# Altium PCB Mako DSP Pro R1.0.PcbDoc (part 1 of 2)
Units mil, origin at the board's own origin, x right, y up, seen from the top; angles counter-clockwise.
Board outline 4040 x 2100 mil, 4 copper layers (Top Layer, GND, Power, Bottom Layer); 159 components, 101 nets, 707 pads, 150 vias.
Unrouted connection lines stored in the file: 172.
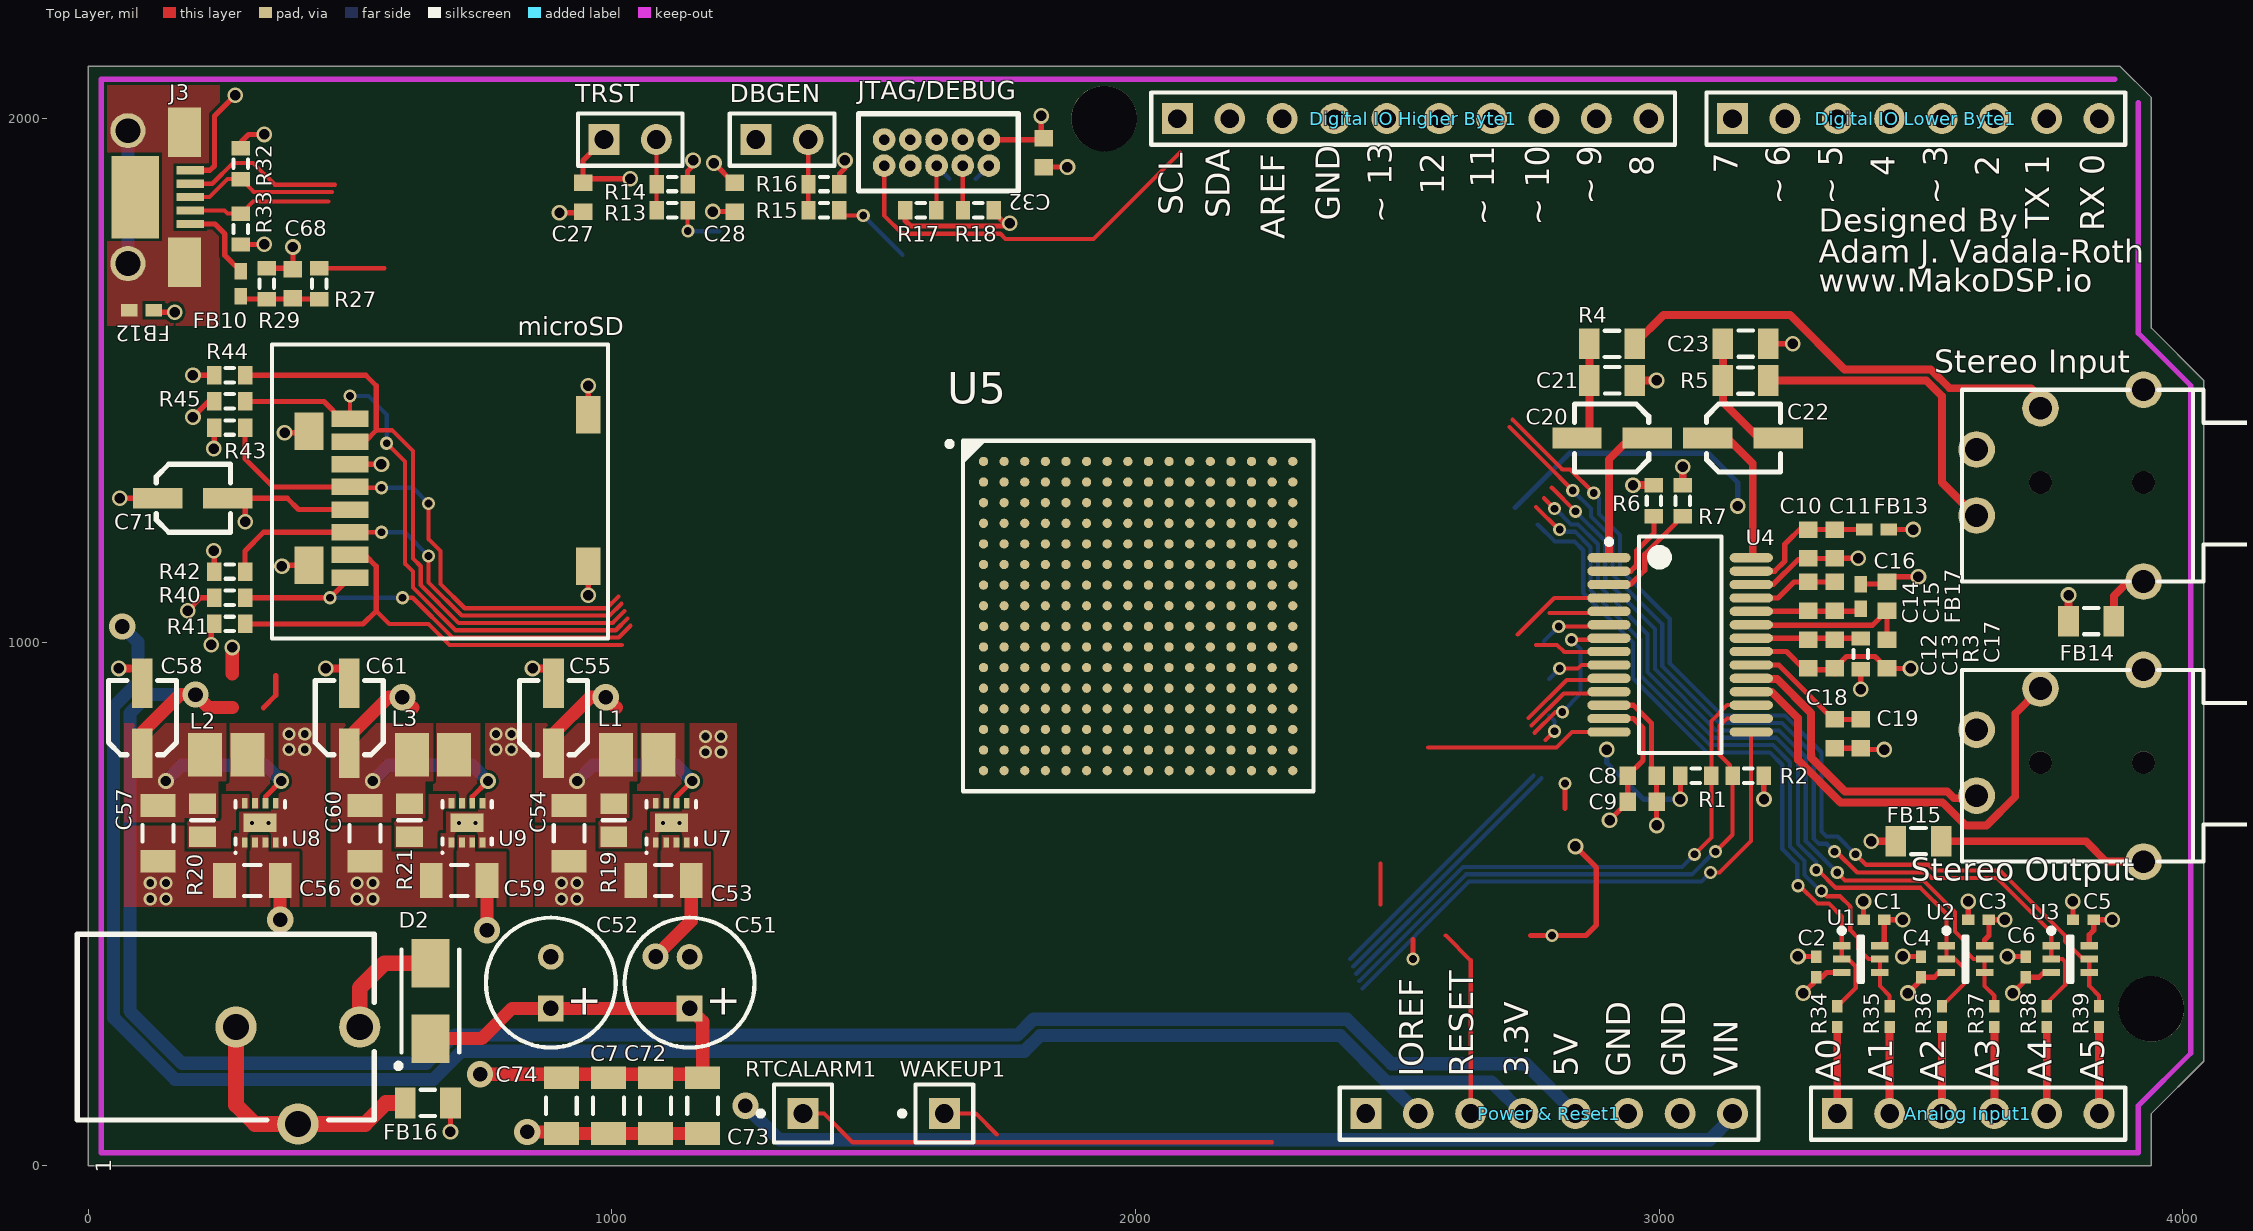
[diagram p0: Top Layer view]
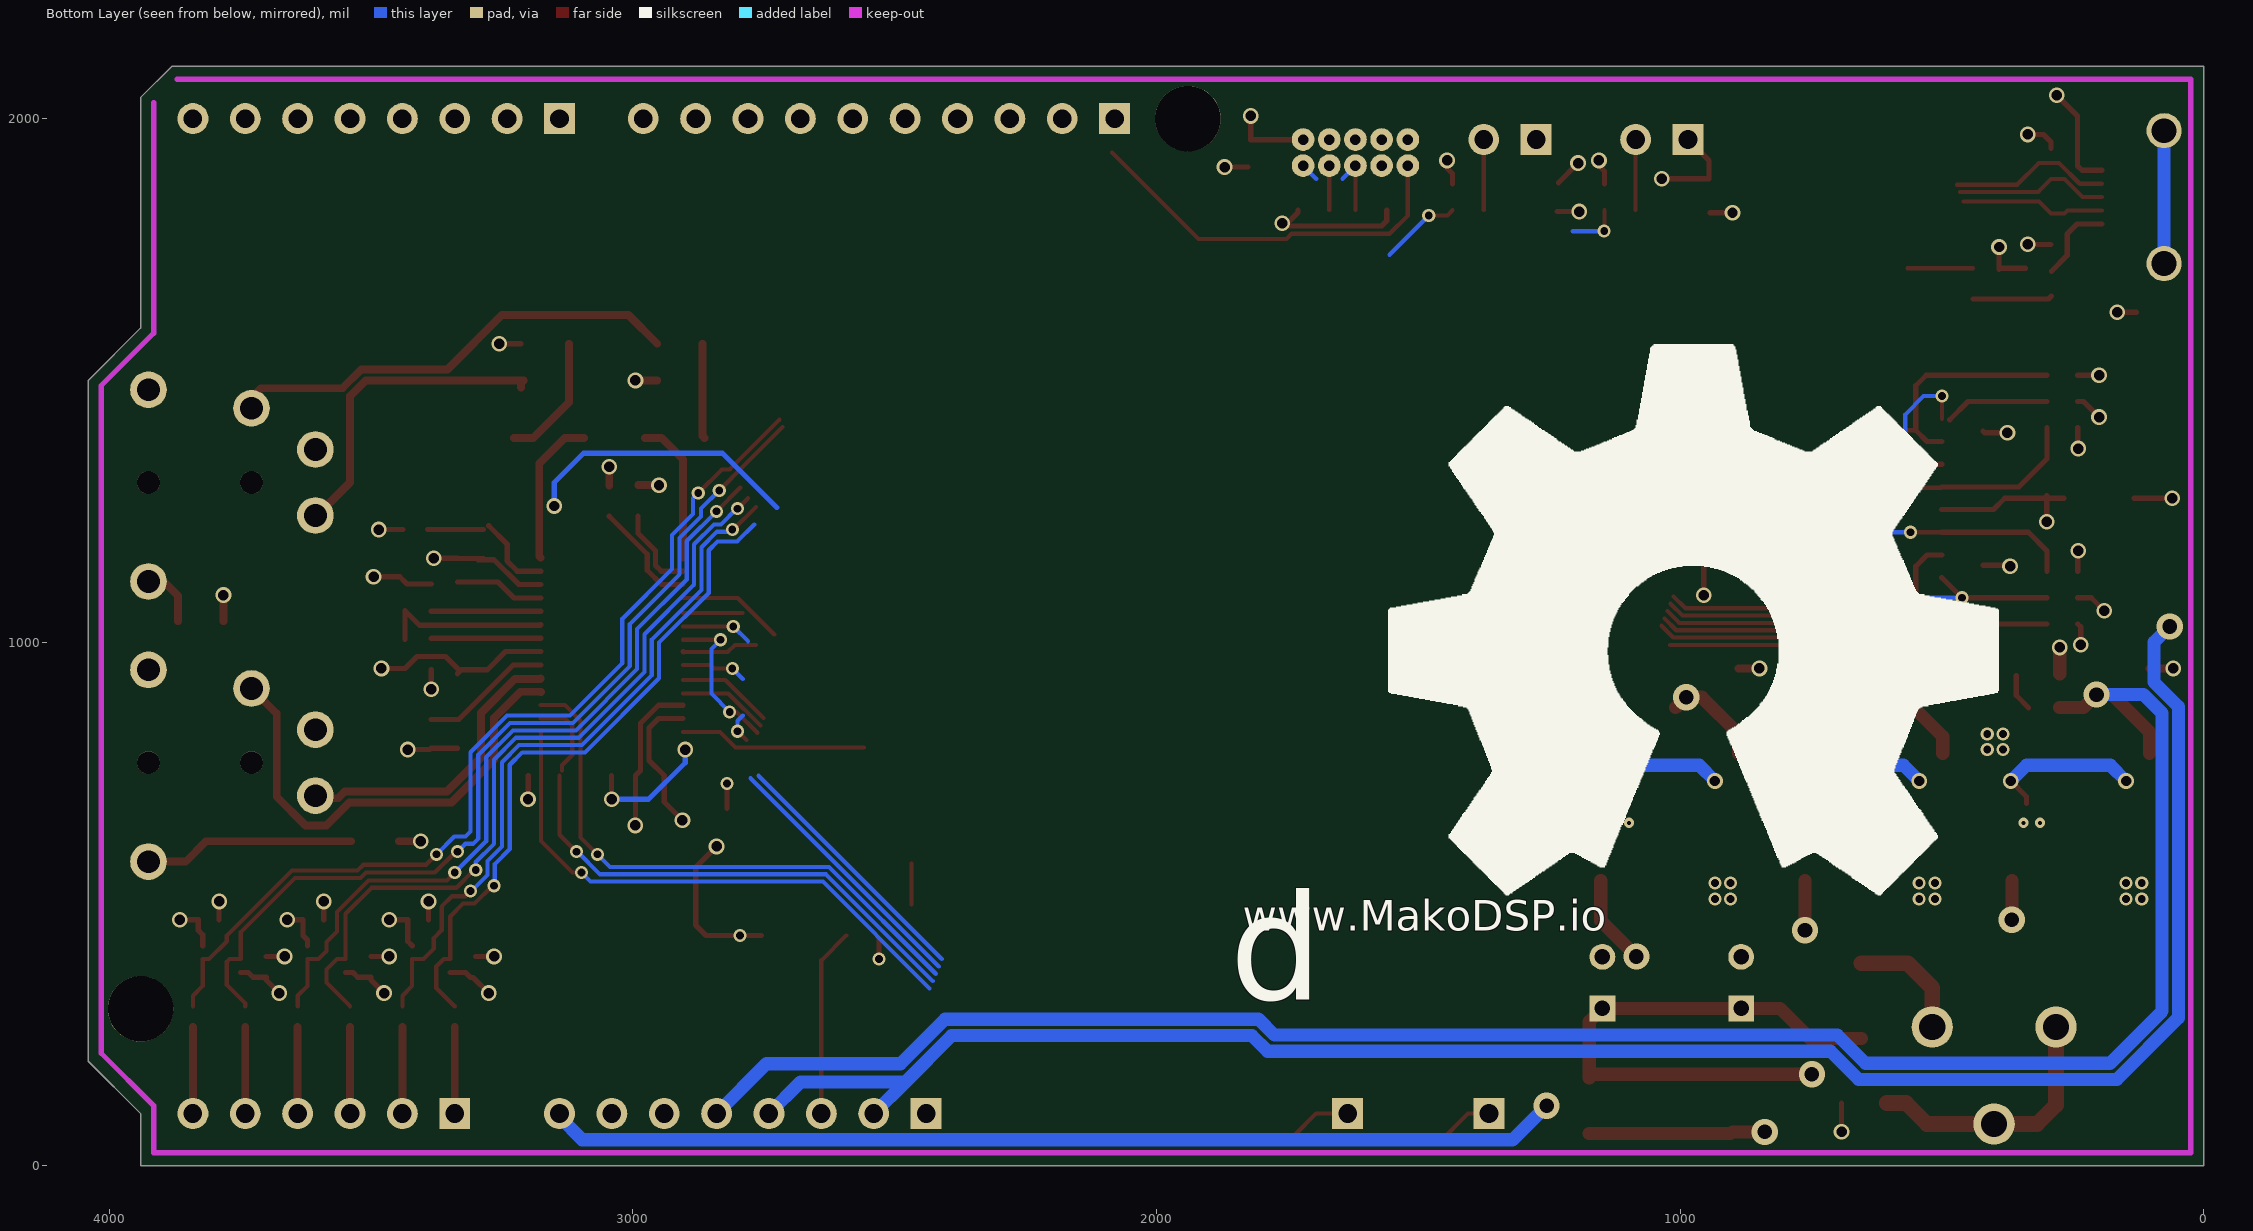
[diagram p1: Bottom Layer view, seen from below]
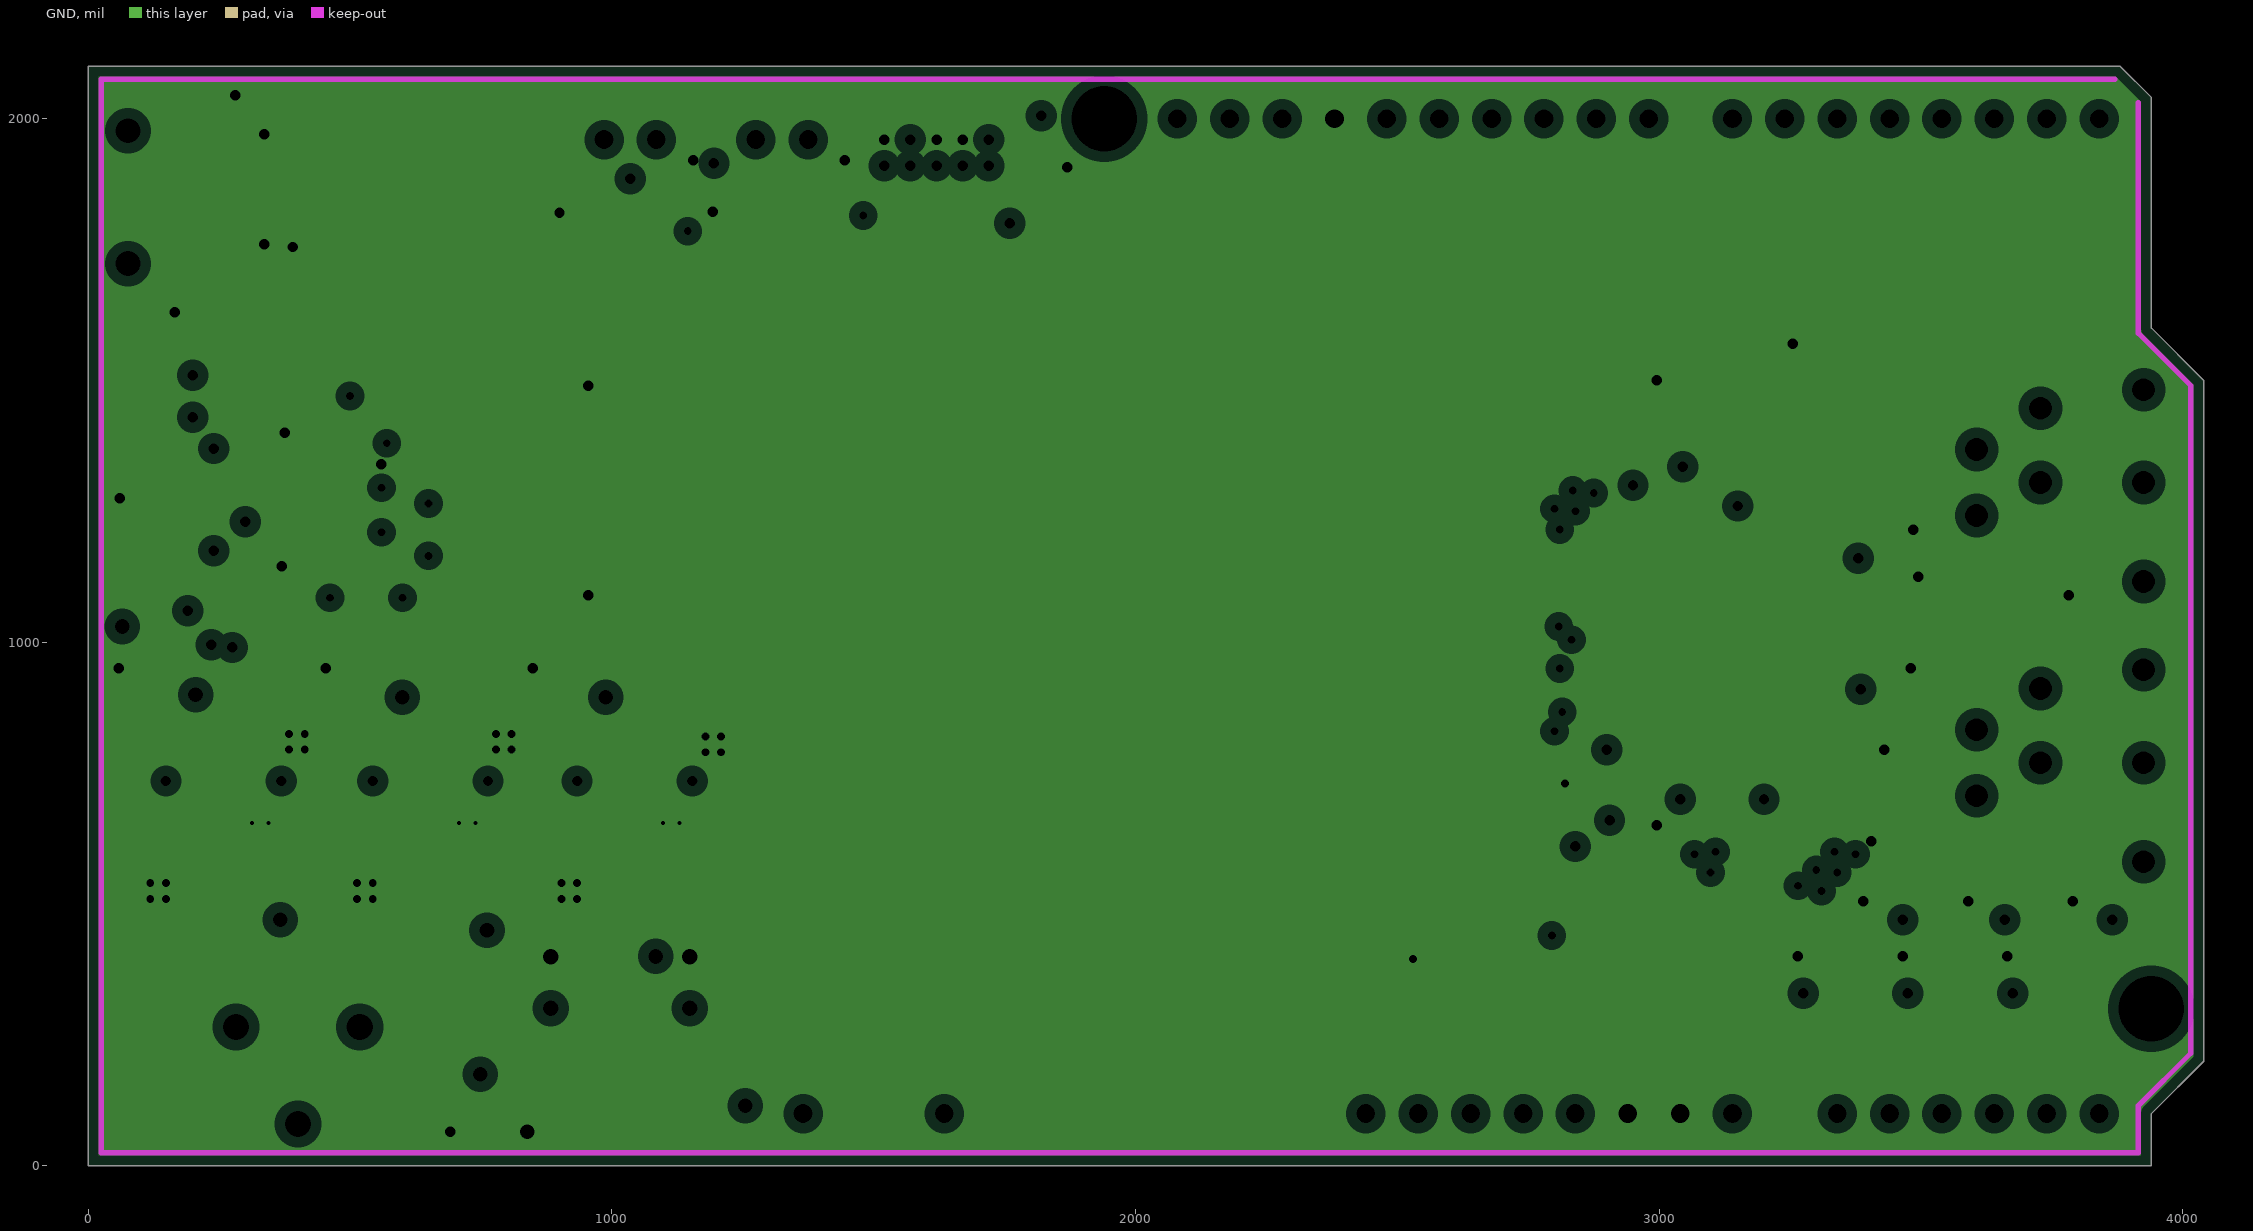
[diagram p2: GND, clearances drawn from the general rule]
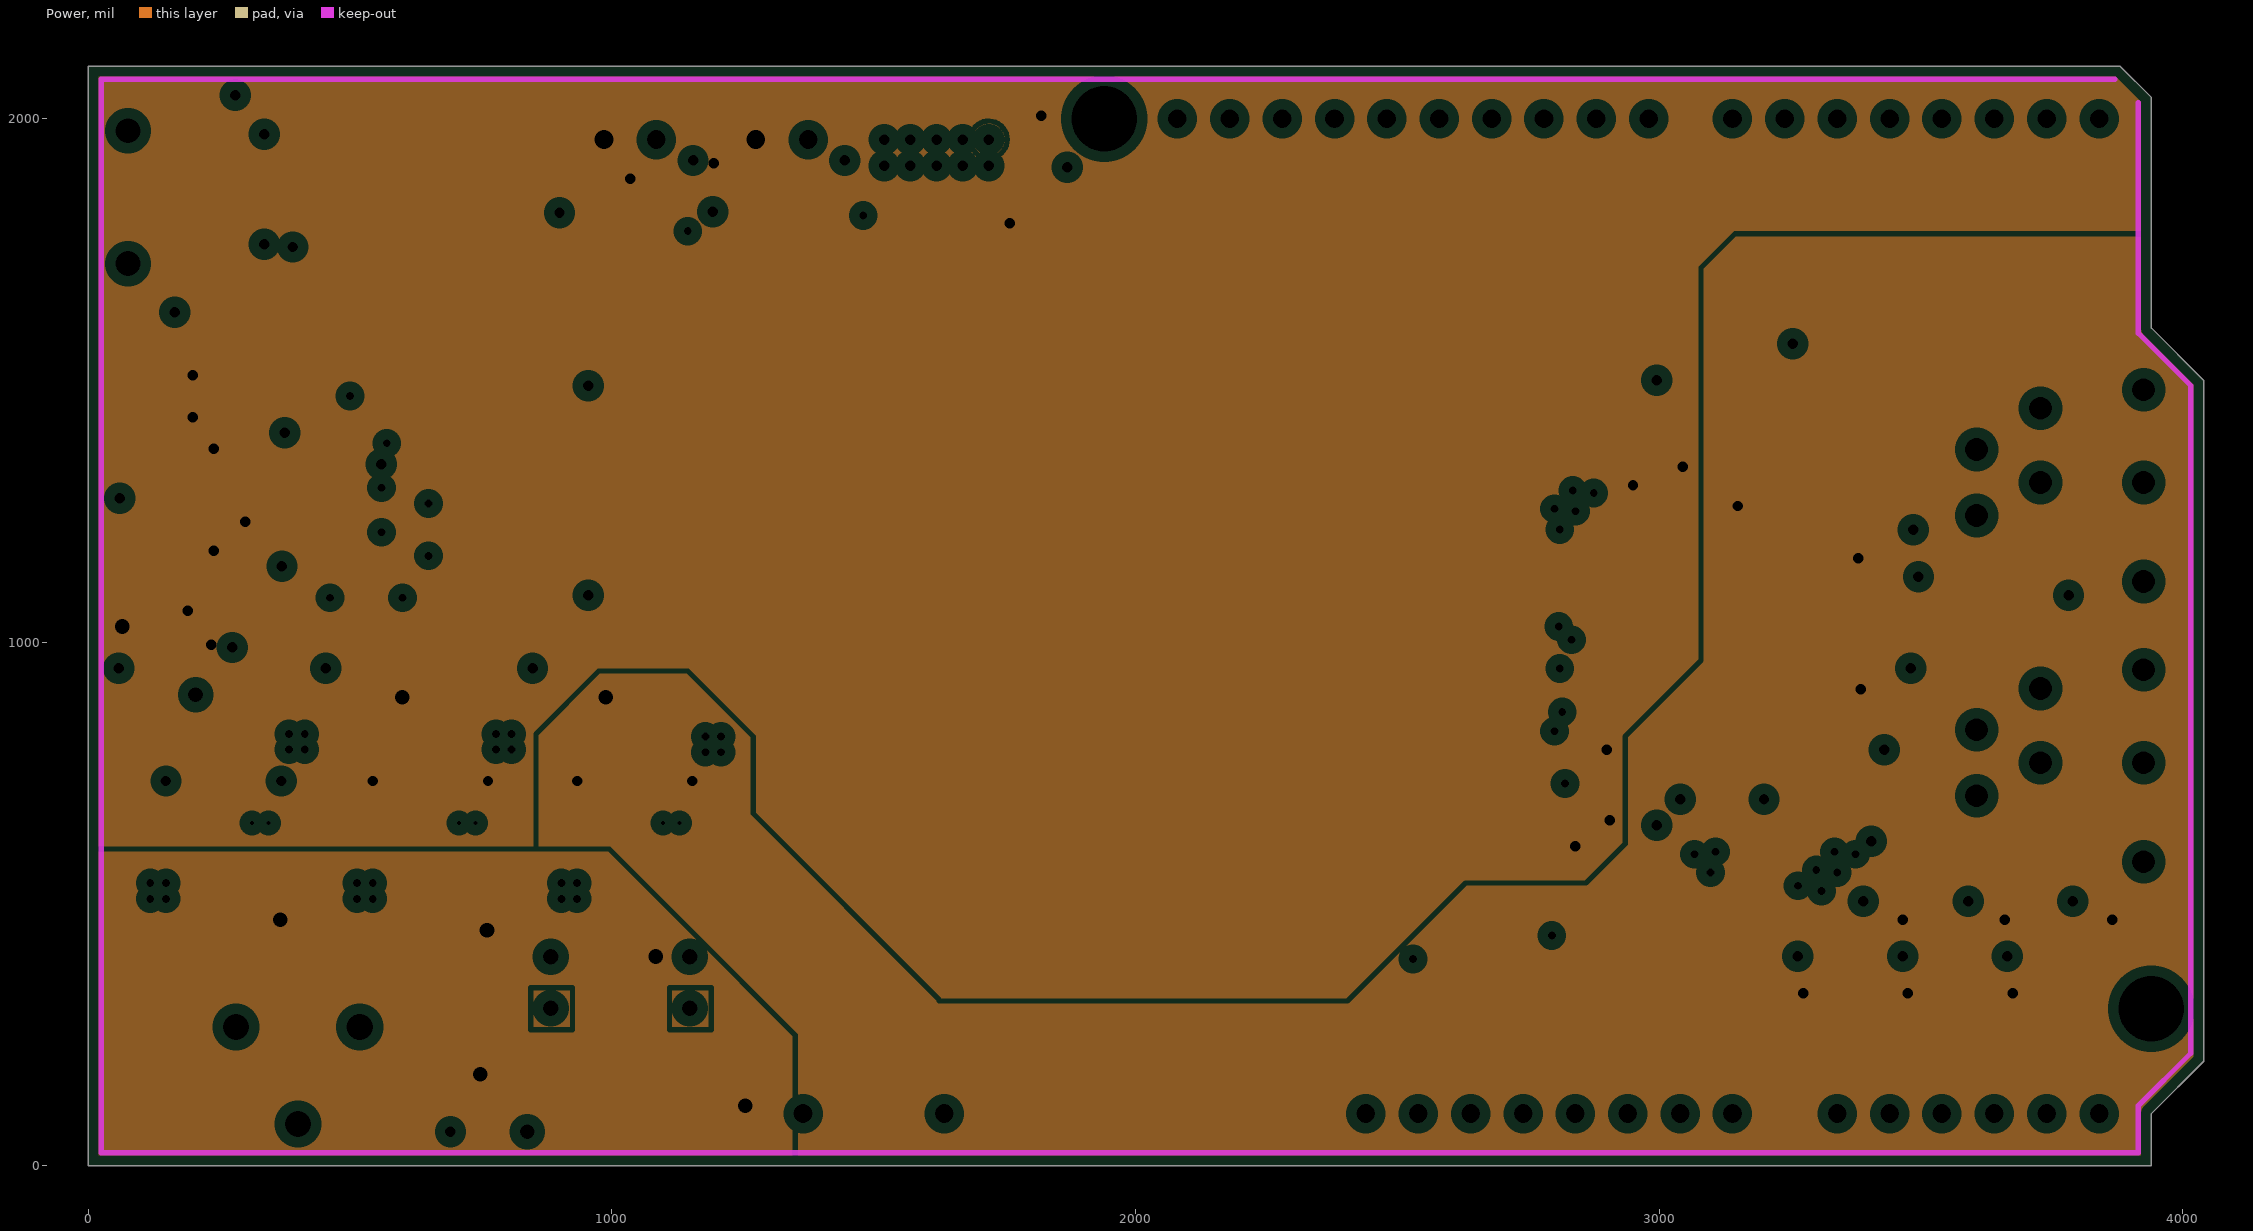
[diagram p3: Power, clearances drawn from the general rule]

## Layer stack, top to bottom
Top Layer: signal copper 1.4
Dielectric: core 12.6, FR-4, Dk 4.8
GND: plane copper 1.4, net GND
Dielectric: prepreg 12.6, FR-4, Dk 4.8
Power: plane copper 1.4, net (Multiple Nets)
Dielectric: core 12.6, FR-4, Dk 4.8
Bottom Layer: signal copper 1.4

## Board outline
0,0 0,2100 3880,2100 3940,2040 3940,1600 4040,1500 4040,200 3940,100 3940,0

## Design rules (kind name [scope] priority, off if disabled: settings)
Clearance [All] p1: gap=6
ComponentClearance [All] p1: gap=0 collisioncheckmode=3 verticalgap=10 showdistances=FALSE
DiffPairsRouting [All] p1: maxlimit=10 minlimit=10 mostfreqgap=10 maxuncoupledlength=500
FanoutControl Fanout_BGA [IsBGA] p1: bgadir=Out bgaviamode=Centered fanoutstyle=BGA fanoutdirection=Alternating viagrid=1 // Fanout_BGA (Default Rule)
FanoutControl Fanout_SOIC [(InComponent('U8') AND InComponent('U7'))] p3: bgadir=Out bgaviamode=Centered fanoutstyle=Staggered fanoutdirection=Alternating viagrid=1 // Fanout_SOIC (Default Rule)
FanoutControl Fanout_Small [All] p4: bgadir=Out bgaviamode=Centered fanoutstyle=Auto fanoutdirection=Alternating viagrid=1 // Fanout_Small (Default Rule)
HoleSize [All] p1: absolutevalues=TRUE maxlimit=120 minlimit=1 maxpercent=80.000 minpercent=20.000
MinimumAnnularRing [All] p1: minimumring=5
MinimumSolderMaskSliver [All] p1 off: minsoldermaskwidth=10
PlaneClearance [All] p1: clearance=20
PlaneConnect [All] p1: planeconnectstyle=Direct reliefexpansion=20 reliefentries=4 reliefconductorwidth=10 reliefairgap=10
PolygonConnect [All] p1: connectstyle=Direct reliefconductorwidth=45 reliefentries=4 polygonreliefangle="90 Angle" airgapwidth=10
RoutingVias [All] p1: holewidth=15 width=25 viastyle="Through Hole" minholewidth=15 minwidth=25 maxholewidth=28 maxwidth=50
SilkToSilkClearance [All] p1 off: silktosilkclearance=10
SilkToSolderMaskClearance SilkscreenOverComponentPads [IsPad] p1 off: minsilkscreentomaskgap=10 clearancetoexposedcopper=TRUE
SolderMaskExpansion [All] p1: expansion=4
Width [All] p1: maxlimit=30 minlimit=6 preferedwidth=6 minimp=50.000000 maximp=50.000000 favimp=50.000000
17 further rules are at their usual default settings.

## Classes and differential pairs
component class "Mako DSP Pro USB R1.0": C26 C50 C62 C63 C64 C68 FB7 FB10 FB12 J3 R22 R27 R29 R32 R33 R47 U6 U10
component class "Mako DSP Pro Main R1.0": C24 C25 C27 C28 C29 C30 C31 C32 C33 C34 C35 C36 C37 C38 C39 C40 C41 C42 C43 C44 C45 C46 C47 C48 C49 C50 C65 C66 C67 C69 C70 C71 C75 C76 C77 DBGEN FB1 FB2 FB3 FB4 FB5 FB6 "ISP PGM" JTAG/DEBUG microSD R8 R12 R13 R14 R15 R16 R17 R18 R40 R41 R42 R43 R44 R45 RESET Reset RTCALARM1 TRST U5 WAKEUP1 X1 X2
component class "Mako DSP Pro Audio Codec R1.0": C8 C9 C10 C11 C12 C13 C14 C15 C16 C17 C18 C19 C20 C21 C22 C23 FB13 FB14 FB15 FB17 R1 R2 R3 R4 R5 R6 R7 "Stereo Input" "Stereo Input?" "Stereo Output" "Stereo Output?" U4
component class "Mako DSP Pro Arduio IO R1.0": "Analog Input1" "Analog Input?" C1 C2 C3 C4 C5 C6 "Digital IO Higher Byte1" "Digital IO Higher Byte?" "Digital IO Lower Byte1" "Digital IO Lower Byte?" "Power & Reset1" "Power & Reset?" R34 R35 R36 R37 R38 R39 SSP? U1 U2 U3
component class "Mako DSP Pro Power R1.0": 1 12VDC/VCCIN C7 C51 C52 C53 C54 C55 C56 C57 C58 C59 C60 C61 C72 C73 C74 D2 D? FB16 L1 L2 L3 L? R19 R20 R21 U7 U8 U9
differential pair USB0: +USB0_P -USB0_N

## Components (designator, comment, footprint, x,y, rotation, side; value= is the part's Value field where it differs from the comment)
1 "Center-positive 2.1 mm power jack" PJ-102AH 518.48,265 r90 top
"Analog Input1" "Arduino Leonardo Analog" "Arduino Leonardo Analog" 3340,100 r0 top locked
C1 "Cap Semi" 0402 3410,470 r0 top
C2 "Cap Semi" 0402 3300,380 r270 top
C3 "Cap Semi" 0402 3610,470 r0 top
C4 "Cap Semi" 0402 3500,380 r270 top
C5 "Cap Semi" 0402 3810,470 r0 top
C6 "Cap Semi" 0402 3700,380 r270 top
C7 "Cap Semi" C1206 993.48,115 r90 top
C8 "Cap Semi" 1608[0603] 2967.56,745.31 r180 top
C9 "Cap Semi" 1608[0603] 2967.56,695.31 r180 top
C10 "Cap Semi" 1608[0603] 3285,1187.56 r270 top
C11 "Cap Semi" 1608[0603] 3335,1187.56 r270 top
C12 "Cap Semi" 1608[0603] 3285,977.56 r90 top
C13 "Cap Semi" 1608[0603] 3335,977.56 r90 top
C14 "Cap Semi" 1608[0603] 3285,1087.56 r90 top
C15 "Cap Semi" 1608[0603] 3335,1087.56 r90 top
C16 "Cap Semi" 1608[0603] 3435,1087.56 r270 top
C17 "Cap Semi" 1608[0603] 3435,977.56 r90 top
C18 "Cap Semi" 1608[0603] 3335,825 r90 top
C19 "Cap Semi" 1608[0603] 3385,825 r90 top
C20 "Cap Semi" "Panasonic VS B" 2910,1390 r0 top
C21 "Cap Semi" "SM 0805 - gap trimmed" 2910,1500 r180 top
C22 "Cap Semi" "Panasonic VS B" 3160,1390 r180 top
C23 "Cap Semi" "SM 0805 - gap trimmed" 3165,1570 r180 top
C24 "Cap Semi" 0402 2905,2407.05 r90 bottom
C25 "Cap Semi" 0402 2780,2407.05 r90 bottom
C26 "Cap Semi" 1608[0603] 1720,2620 r180 top
C27 "Cap Semi" CAPC1608L 945,1850 r90 top
C28 "Cap Semi" CAPC1608L 1235,1850 r90 top
C29 "Cap Semi" CAPC1608L 2860,3155 r0 top
C30 "Cap Semi" 1608[0603] 1515,3850 r90 top
C31 "Cap Semi" 1608[0603] 1865,3837.05 r90 top
C32 "Cap Semi" CAPC1608L 1825,1935 r270 top
C33 "Cap Semi" 1608[0603] 2875,3947.05 r90 top
C34 "Cap Semi" 1608[0603] 2820,3947.05 r90 top
C35 "Cap Semi" 1608[0603] 2900,3687.05 r90 top
C36 "Cap Semi" 1608[0603] 2900,3792.05 r270 top
C37 "Cap Semi" 0402 2745,3497.05 r180 top
C38 "Cap Semi" 0402 2515,3242.05 r90 top
C39 "Cap Semi" 0402 2230,3225 r90 top
C40 "Cap Semi" 0402 1805,-250 r90 top
C41 "Cap Semi" 0402 1575,-210 r90 top
C42 "Cap Semi" 0402 1395,-270 r90 top
C43 "Cap Semi" 0402 1560,-400 r0 top
C44 "Cap Semi" 0402 1200,3702.05 r0 top
C45 "Cap Semi" 0402 1855,3705 r90 top
C46 "Cap Semi" 0402 1445,3697.05 r270 top
C47 "Cap Semi" 0402 2130,3492.05 r270 top
C48 "Cap Semi" 0402 2685,3880 r270 top
C49 "Cap Semi" 0402 2700,3802.05 r270 top
C50 "Cap Semi" 0402 4550,725 r90 top
C50 "Cap Semi" 1608[0603] 1715,2440 r0 top
C51 "Cap Pol1" CAPPR2.5-6.3x5 1148.48,350 r90 top
C52 "Cap Pol1" CAPPR2.5-6.3x5 883.48,350 r90 top
C53 "Cap Semi" C1206 1098.48,545 r0 top
C54 "Cap Semi" C1206 918.48,635 r90 top
C55 "Cap Semi" "Panasonic VS B" 888.48,855 r270 top
C56 "Cap Semi" C1206 313.48,545 r0 top
C57 "Cap Semi" C1206 133.48,635 r90 top
C58 "Cap Semi" "Panasonic VS B" 103.48,855 r270 top
C59 "Cap Semi" C1206 708.48,545 r0 top
C60 "Cap Semi" C1206 528.48,635 r90 top
C61 "Cap Semi" "Panasonic VS B" 498.48,855 r270 top
C62 "Cap Semi" 1608[0603] 1595,2610 r180 top
C63 "Cap Semi" 1608[0603] 1595,2555 r180 top
C64 "Cap Semi" 1608[0603] 1570,2475 r90 top
C65 "Cap Semi" 0402 4780,725 r90 top
C66 "Cap Semi" 0402 5010,725 r90 top
C67 "Cap Semi" 0402 5240,725 r90 top
C68 "Cap Semi" 1608[0603] 390.96,1684.74 r270 top
C69 "Cap Semi" 0402 5470,725 r90 top
C70 "Cap Semi" 0402 5700,725 r90 top
C71 "Cap Semi" "Panasonic VS B" 200,1274.92 r180 top
C72 "Cap Semi" C1206 1083.48,115 r90 top
C73 "Cap Semi" C1206 1173.48,115 r90 top
C74 "Cap Semi" C1206 903.48,115 r90 top
C75 "Cap Semi" 0402 5930,725 r90 top
C76 "Cap Semi" 0402 6160,725 r90 top
C77 "Cap Semi" 0402 6390,725 r90 top
D2 "PMEG4050EP" PMEG4050EP 653.48,315 r90 top
DBGEN "Header 2" HDR1X2 1275,1960 r0 top (schematic designator DBGEN1)
"Digital IO Higher Byte1" "Arduino Leonardo High Byte" "Arduino Leonardo High Byte" 2080,2000 r0 top locked
"Digital IO Lower Byte1" "Arduino Leonardo Low Byte" "Arduino Leonardo Low Byte" 3140,2000 r0 top locked
FB1 "BLM15HG601SN1D" BLM18PG121SN1D 2735,2397.05 r90 bottom
FB2 "BLM15HG601SN1D" BLM18PG121SN1D 2860,2397.05 r90 bottom
FB3 "BLM15HG601SN1D" BLM18PG121SN1D 2601.42,2397.05 r270 bottom
FB4 "BLM15HG601SN1D" BLM18PG121SN1D 2680,2397.05 r270 bottom
FB5 "BLM15HG601SN1D" BLM18PG121SN1D 2955,3972.05 r180 top
FB6 "BLM15HG601SN1D" BLM18PG121SN1D 2955,3922.05 r180 top
FB7 "BLM15HG601SN1D" BLM18PG121SN1D 1625,2475 r270 top
FB10 "BLM15HG601SN1D" BLM18PG121SN1D 290.96,1684.74 r90 top
FB12 "BLM15HG601SN1D" BLM18PG121SN1D 101.54,1634.02 r0 top
FB13 "BLM15HG601SN1D" BLM18PG121SN1D 3415.16,1215.16 r0 top
FB14 "Ferrite" "SM 0805 - gap trimmed" 3825,1040 r180 top
FB15 "Ferrite" "SM 0805 - gap trimmed" 3495,620 r180 top
FB16 "Ferrite" "SM 0805 - gap trimmed" 648.48,120 r180 top
FB17 "BLM15HG601SN1D" BLM18PG121SN1D 3385,1087.56 r90 top
J3 "DX4R005J91R5100" "Micro USB Circular Holes Only" 36.54,1849.02 r270 top
JTAG/DEBUG "S9015E-05-ND" S9015E-05-ND 1520,1960 r0 top (schematic designator JTAG/DEBUG1)
L1 "Inductor" VLS252012T-2R2M1R3 1048.48,785 r180 top
L2 "Inductor" VLS252012T-2R2M1R3 263.48,785 r180 top
L3 "Inductor" VLS252012T-2R2M1R3 658.48,785 r180 top
microSD "JAE SJ107021" "JAE SJ107021" 955,1274.92 r0 top (schematic designator SD1)
"Power & Reset1" "Arduino Leonardo Power" "Arduino Leonardo Power" 2440,100 r0 top locked
R1 "Res3" J1-0603 3070.16,745.16 r180 top
R2 "Res3" J1-0603 3170.16,745.16 r0 top
R3 "Res3" J1-0603 3385,977.56 r270 top
R4 "Res3" "SM 0805 - gap trimmed" 2910,1570 r0 top
R5 "Res3" "SM 0805 - gap trimmed" 3165,1500 r0 top
R6 "Res3" J1-0603 2990,1270 r270 top
R7 "Res3" J1-0603 3045,1270 r270 top
R8 "Res3" J1-0603 2515,2397.05 r90 bottom
R12 "Res3" J1-0603 3020,3155 r0 top
R13 "Res3" J1-0603 1115,1825 r180 top
R14 "Res3" J1-0603 1115,1875 r180 top
R15 "Res3" J1-0603 1405,1825 r180 top
R16 "Res3" J1-0603 1405,1875 r180 top
R17 "Res3" J1-0603 1590,1825 r180 top
R18 "Res3" J1-0603 1700,1825 r0 top
R19 "Res3" RESC2012L 1003.48,660 r90 top
R20 "Res3" RESC2012L 218.48,660 r90 top
R21 "Res3" RESC2012L 613.48,660 r90 top
R22 "Res3" J1-0603 1215,2480 r90 top
R27 "Res3" J1-0603 440.96,1684.74 r90 top
R29 "Res3" J1-0603 340.96,1684.74 r90 top
R32 "Res3" J1-0603 291.54,1914.02 r90 top
R33 "Res3" J1-0603 291.54,1789.02 r270 top
R34 "Res3" "0402 - duplicate" 3340,285 r90 top
R35 "Res3" "0402 - duplicate" 3440,285 r90 top
R36 "Res3" "0402 - duplicate" 3540,285 r90 top
R37 "Res3" "0402 - duplicate" 3640,285 r90 top
R38 "Res3" "0402 - duplicate" 3740,285 r90 top
R39 "Res3" "0402 - duplicate" 3840,285 r90 top
R40 "Res3" J1-0603 270,1084.92 r0 top
R41 "Res3" J1-0603 270,1034.92 r0 top
R42 "Res3" J1-0603 270,1134.92 r0 top
R43 "Res3" J1-0603 270,1409.92 r0 top
R44 "Res3" J1-0603 270,1509.92 r0 top
R45 "Res3" J1-0603 270,1459.92 r0 top
R47 "Res3" J1-0603 1215,2585 r90 top
Reset "Tactile Switch" TL3301 2940,3305 r90 top (schematic designator RESET1)
RTCALARM1 "Socket" PIN1 1365,100 r90 top
"Stereo Input" "CUI 43515TS" "CUI SJ-43515TS" 3925,1305 r180 top (schematic designator "Stereo Input1")
"Stereo Output" "CUI 43515TS" "CUI SJ-43515TS" 3925,770 r180 top (schematic designator "Stereo Output1")
TRST "Header 2" HDR1X2 985,1960 r0 top (schematic designator TRST1)
U1 "BAV70S SOT-363" BAV70S_SOT363 3385,395 r0 top
U2 "BAV70S SOT-363" BAV70S_SOT363 3585,395 r0 top
U3 "BAV70S SOT-363" BAV70S_SOT363 3785,395 r0 top
U4 "WM8778" WM8778 3040,995 r0 top
U5 "LPC4330FET256" SOT740-2 2005,1050 r0 top
U6 "BAV70S SOT-363" BAV70S_SOT363 1720,2530 r90 top
U7 "TPS62162SOP" DSG8-1600X900TP 1113.48,655 r90 top
U8 "TPS62162SOP" DSG8-1600X900TP 328.48,655 r90 top
U9 "TPS62162SOP" DSG8-1600X900TP 723.48,655 r90 top
U10 "LM3525" LM3525 1390,2530 r0 top
WAKEUP1 "Socket" PIN1 1635,100 r90 top
X1 "ABM3B-12.000MHZ-B2-T" ABM3B-12.000MHZ-B2-T 1780,3870 r180 top
X2 "ABS07-32.768KHZ-T" ABS07-32.768KHZ-T 2810,3702.05 r90 top

## Footprints (in the part's own frame and the unit in brackets; to place one, negate y for a bottom-side part, rotate by r counter-clockwise, add the part's x,y. Pads: shape width x height; smd on the part's side, far side on the other; paste and mask are expansions set on the pad)
0402 [mm] "Chip Capacitor, Body 1.0x0.5mm, IPC High Density"
  rect 0.6x0.5 smd: 1(-0.5,0) 2(0.5,0)
  body extent -0.55,-0.3 0.55,0.3, height 1.3
"0402 - duplicate" [mm] "Chip Capacitor, Body 1.0x0.5mm, IPC High Density"
  rect 0.6x0.5 smd: 1(-0.5,0) 2(0.5,0)
  body extent -0.55,-0.3 0.55,0.3, height 1.3
1608[0603] [mm] "Chip Capacitor, Body 1.6x0.8mm, IPC High Density"
  rect 0.8x0.9 smd: 1(-0.7,0) 2(0.7,0)
  body extent -0.87,-0.48 0.87,0.48, height 1.3
ABM3B-12.000MHZ-B2-T [mm] "ABM3B-12.000MHZ-B2-T 12MHZ Crystam Oscillator"
  rect 1.8x1.2 smd: 1(0,0) 2(4,0) 3(4,2.4) 4(0,2.4)
  silkscreen extent -1.5,-1.2 5.5,3.5
ABS07-32.768KHZ-T [mm] "ABS07-32.768KHZ-T Crystal Oscillator"
  rect 1.1x1.9 smd: 1(0,0) 2(1.95,0)
  silkscreen extent -1.1,-1.5 3,1.5
"Arduino Leonardo Analog" [mm] "Connector; Header; 6 Position"
  rect 1.5x1.5 hole 0.9: 1(0,0)
  round 1.5 hole 0.9: 2(2.54,0) 3(5.08,0) 4(7.62,0) 5(10.16,0) 6(12.7,0)
  silkscreen extent -1.27,-1.27 13.97,1.27
"Arduino Leonardo High Byte" [mm]
  rect 1.5x1.5 hole 0.9: 1(0,0)
  round 1.5 hole 0.9: 2(2.54,0) 3(5.08,0) 4(7.62,0) 5(10.16,0) 6(12.7,0) 7(15.24,0) 8(17.78,0) 9(20.32,0) 10(22.86,0)
  silkscreen extent -1.27,-1.27 24.13,1.27
"Arduino Leonardo Low Byte" [mm] "Connector; Header; 8 Position"
  rect 1.5x1.5 hole 0.9: 1(0,0)
  round 1.5 hole 0.9: 2(2.54,0) 3(5.08,0) 4(7.62,0) 5(10.16,0) 6(12.7,0) 7(15.24,0) 8(17.78,0)
  silkscreen extent -1.27,-1.27 19.05,1.27
"Arduino Leonardo Power" [mm] "Connector; Header; 8 Position"
  rect 1.5x1.5 hole 0.9: 1(0,0)
  round 1.5 hole 0.9: 2(2.54,0) 3(5.08,0) 4(7.62,0) 5(10.16,0) 6(12.7,0) 7(15.24,0) 8(17.78,0)
  silkscreen extent -1.27,-1.27 19.05,1.27
BAV70S_SOT363 [mm] "SOT23, 6-Leads, Body 2.2x2.2mm (max), Pitch 0.65mm, IPC Medium Density"
  rect 0.85x0.35 smd: 1(-0.925,0.65) 2(-0.925,0) 3(-0.925,-0.65) 4(0.925,-0.65) 5(0.925,0) 6(0.925,0.65)
  silkscreen extent -1.05,-1.1 0.1,1.5, body extent -0.67,-1.1 0.67,1.1, height 1.1
BLM18PG121SN1D [mm] "Chip Inductor, 2-Leads, Body 1.0x0.5mm, IPC Medium Density"
  rect 0.8x0.6 smd: 1(-0.6,0) 2(0.6,0)
  body extent -0.52,-0.28 0.53,0.27, height 0.6
C1206 [mm] "Chip Capacitor, Body 3.2x1.6mm, IPC High Density"
  rect 1.1x1.7 smd: 1(-1.35,0) 2(1.35,0)
  silkscreen extent -0.4,-0.75 0.4,0.75, body extent -1.7,-0.9 1.7,0.9, height 1.3
CAPC1608L [mm] "Chip Capacitor, Body 1.6x0.8mm, IPC High Density"
  rect 0.8x0.9 smd: 1(-0.7,0) 2(0.7,0)
  body extent -0.87,-0.48 0.87,0.48, height 0.85
CAPPR2.5-6.3x5 [mm] "Capacitor, Electrolytic, Radial; Body 6.3 x 5 mm (Dia.xH typ); Pin Spacing 2.5 mm (typ)"
  rect 1.25x1.25 hole 0.75: 1(-1.25,0)
  round 1.25 hole 0.75: 2(1.25,0)
  silkscreen extent -3.15,-3.15 3.15,3.15
"CUI SJ-43515TS" [mm]
  round 1.778 hole 1.1: 1(8.1,1.6) 3(8.1,-1.6) 4(5,-3.6) 5(0,4.8) 6(0,-4.5)
  round 1.1 hole 1.1: ""(0,0) ""(5,0)
  silkscreen extent -5.4,-4.5 8.8,4.8
DSG8-1600X900TP [mm] "SON, 8-Leads, Body 2x2mm, Pitch 0.5mm, Thermal Pad 1.6x0.9mm, TI Recommended"
  rect 0.5x0.28 smd paste-0.14 mask+0.07: 1(-0.95,0.75) 2(-0.95,0.25) 3(-0.95,-0.25) 4(-0.95,-0.75) 5(0.95,-0.75) 6(0.95,-0.25) 7(0.95,0.25) 8(0.95,0.75)
  rect 0.9x1.6 smd paste-0.45 mask+0.07: 9(0,0)
  silkscreen extent -1.5,-1.2 1.05,1.25, body extent -1.05,-1.05 1.05,1.05, height 0.8
HDR1X2 [mm] "Connector; Header; 2 Position"
  rect 1.5x1.5 hole 0.9: 1(0,0)
  round 1.5 hole 0.9: 2(2.54,0)
  silkscreen extent -1.27,-1.27 3.81,1.27
J1-0603 [mm] "Chip Resistor, Body 1.6x0.8mm, IPC High Density"
  rect 0.7x0.9 smd: 1(-0.75,0) 2(0.75,0)
  silkscreen extent -0.2,-0.35 0.2,0.35, body extent -0.85,-0.48 0.85,0.48, height 0.9
"JAE SJ107021" [mm] "MicroSD card socket"
  rect 1.8x0.8 smd: 1(-11.55,-3.85) 2(-11.55,-2.75) 3(-11.55,-1.65) 4(-11.55,-0.55) 5(-11.55,0.55) 6(-11.55,1.65) 7(-11.55,2.75) 8(-11.55,3.85)
  rect 1.2x1.8 smd: 9(0,-3.3) 10(0,4.05)
  rect 1.4x1.8 smd: 11(-13.55,-3.25) 12(-13.55,3.25)
  silkscreen extent -15.35,-6.8 0.95,7.45, body extent -15.25,-6.75 1,7.5, height 2
LM3525 [mm]
  oval 2.05x0.6 smd: 1(-2.35,1.905) 2(-2.35,0.635) 3(-2.35,-0.635) 4(-2.35,-1.905) 5(2.35,-1.905) 6(2.35,-0.635) 7(2.35,0.635) 8(2.35,1.905)
  silkscreen extent -2.47,-2.45 0.92,2.88, body extent -1.95,-2.45 1.95,2.45, height 1.45
"Micro USB Circular Holes Only" [mm]
  rect 0.4x1.35 smd: 1(1.275,4.025) 2(0.625,4.025) 3(-0.025,4.025) 4(-0.675,4.025) 5(-1.325,4.025)
  rect 2.4x1.6 smd: 6(3.125,3.75) 9(-3.175,3.75)
  round 1.7 hole 1.2: 7(3.2,1) 8(-3.25,1)
  rect 4x2.3 smd: GND(-0.025,1.35)
"Panasonic VS B" [mm]
  rect 2.4x1 smd: 1(1.7,0) 2(-1.7,0)
  silkscreen extent -1.83,-1.65 1.78,1.65
PIN1 [mm] "Connector; Plug"
  rect 1.5x1.5 hole 0.9: 1(0,0)
  silkscreen extent -1.4,-1.4 1.4,2.17
PJ-102AH [mm] "Center positive 2.1 mm power jack"
  round 2 hole 1.27: 1(0,0) 2(0,6) 3(-4.7,3)
  silkscreen extent -4.5,-0.7 4.5,13.7, body extent -5.8,-0.7 4.5,13.7, height 11
PMEG4050EP [mm] "PMEG4050EP NXP SMD Schottky Diode"
  rect 2.35x1.85 smd: 1(-1.825,0) 2(1.825,0)
  silkscreen extent -3.27,-1.4 2.5,1.67, body extent -2.5,-1.35 2.5,1.35, height 1.1
RESC2012L [mm] "Chip Resistor, Body 2.0x1.3mm, IPC High Density"
  rect 1x1.3 smd: 1(-0.8,0) 2(0.8,0)
  silkscreen extent 0,-0.55 0,0.55, body extent -1.07,-0.7 1.07,0.7, height 0.65
S9015E-05-ND [mm] "10 Pin Cortex JTAG Debug Header"
  round 1.1 hole 0.508: 1(5.08,0) 2(5.08,-1.27) 3(3.81,0) 4(3.81,-1.27) 5(2.54,0) 6(2.54,-1.27) 7(1.27,0) 8(1.27,-1.27) 9(0,0) 10(0,-1.27)
  round 0.5 on Top Overlay: 1(7,0.8)
  silkscreen extent -1.25,-2.5 6.5,1.25
"SM 0805 - gap trimmed" [mm]
  rect 1x1.5 smd: 1(-1.1,0) 2(1.1,0)
  silkscreen extent -0.36,-0.64 0.35,0.63
SOT740-2 [mm] "BGA, 256-Leads, Body 17x17mm, Pitch 1mm"
  round 0.45 smd: A1(-7.5,7.5) A2(-6.5,7.5) A3(-5.5,7.5) A4(-4.5,7.5) A5(-3.5,7.5) A6(-2.5,7.5) A7(-1.5,7.5) A8(-0.5,7.5) A9(0.5,7.5) A10(1.5,7.5) A11(2.5,7.5) A12(3.5,7.5) A13(4.5,7.5) A14(5.5,7.5) A15(6.5,7.5) A16(7.5,7.5) B1(-7.5,6.5) B2(-6.5,6.5) B3(-5.5,6.5) B4(-4.5,6.5) B5(-3.5,6.5) B6(-2.5,6.5) B7(-1.5,6.5) B8(-0.5,6.5) B9(0.5,6.5) B10(1.5,6.5) B11(2.5,6.5) B12(3.5,6.5) B13(4.5,6.5) B14(5.5,6.5) B15(6.5,6.5) B16(7.5,6.5) C1(-7.5,5.5) C2(-6.5,5.5) C3(-5.5,5.5) C4(-4.5,5.5) C5(-3.5,5.5) C6(-2.5,5.5) C7(-1.5,5.5) C8(-0.5,5.5) C9(0.5,5.5) C10(1.5,5.5) C11(2.5,5.5) C12(3.5,5.5) C13(4.5,5.5) C14(5.5,5.5) C15(6.5,5.5) C16(7.5,5.5) D1(-7.5,4.5) D2(-6.5,4.5) D3(-5.5,4.5) D4(-4.5,4.5) D5(-3.5,4.5) D6(-2.5,4.5) D7(-1.5,4.5) D8(-0.5,4.5) D9(0.5,4.5) D10(1.5,4.5) D11(2.5,4.5) D12(3.5,4.5) D13(4.5,4.5) D14(5.5,4.5) D15(6.5,4.5) D16(7.5,4.5) E1(-7.5,3.5) E2(-6.5,3.5) E3(-5.5,3.5) E4(-4.5,3.5) E5(-3.5,3.5) E6(-2.5,3.5) E7(-1.5,3.5) E8(-0.5,3.5) E9(0.5,3.5) E10(1.5,3.5) E11(2.5,3.5) E12(3.5,3.5) E13(4.5,3.5) E14(5.5,3.5) E15(6.5,3.5) E16(7.5,3.5) F1(-7.5,2.5) F2(-6.5,2.5) F3(-5.5,2.5) F4(-4.5,2.5) F5(-3.5,2.5) F6(-2.5,2.5) F7(-1.5,2.5) F8(-0.5,2.5) F9(0.5,2.5) F10(1.5,2.5) F11(2.5,2.5) F12(3.5,2.5) F13(4.5,2.5) F14(5.5,2.5) F15(6.5,2.5) F16(7.5,2.5) G1(-7.5,1.5) G2(-6.5,1.5) G3(-5.5,1.5) G4(-4.5,1.5) G5(-3.5,1.5) G6(-2.5,1.5) G7(-1.5,1.5) G8(-0.5,1.5) G9(0.5,1.5) G10(1.5,1.5) G11(2.5,1.5) G12(3.5,1.5) G13(4.5,1.5) G14(5.5,1.5) G15(6.5,1.5) G16(7.5,1.5) H1(-7.5,0.5) H2(-6.5,0.5) H3(-5.5,0.5) H4(-4.5,0.5) H5(-3.5,0.5) H6(-2.5,0.5) H7(-1.5,0.5) H8(-0.5,0.5) H9(0.5,0.5) H10(1.5,0.5) H11(2.5,0.5) H12(3.5,0.5) H13(4.5,0.5) H14(5.5,0.5) H15(6.5,0.5) H16(7.5,0.5) J1(-7.5,-0.5) J2(-6.5,-0.5) J3(-5.5,-0.5) J4(-4.5,-0.5) J5(-3.5,-0.5) J6(-2.5,-0.5) J7(-1.5,-0.5) J8(-0.5,-0.5) J9(0.5,-0.5) J10(1.5,-0.5) J11(2.5,-0.5) J12(3.5,-0.5) J13(4.5,-0.5) J14(5.5,-0.5) J15(6.5,-0.5) J16(7.5,-0.5) K1(-7.5,-1.5) K2(-6.5,-1.5) K3(-5.5,-1.5) K4(-4.5,-1.5) K5(-3.5,-1.5) K6(-2.5,-1.5) K7(-1.5,-1.5) K8(-0.5,-1.5) K9(0.5,-1.5) K10(1.5,-1.5) K11(2.5,-1.5) K12(3.5,-1.5) K13(4.5,-1.5) K14(5.5,-1.5) K15(6.5,-1.5) K16(7.5,-1.5) L1(-7.5,-2.5) L2(-6.5,-2.5) L3(-5.5,-2.5) L4(-4.5,-2.5) L5(-3.5,-2.5) L6(-2.5,-2.5) L7(-1.5,-2.5) L8(-0.5,-2.5) L9(0.5,-2.5) L10(1.5,-2.5) L11(2.5,-2.5) L12(3.5,-2.5) L13(4.5,-2.5) L14(5.5,-2.5) L15(6.5,-2.5) L16(7.5,-2.5) M1(-7.5,-3.5) M2(-6.5,-3.5) M3(-5.5,-3.5) M4(-4.5,-3.5) M5(-3.5,-3.5) M6(-2.5,-3.5) M7(-1.5,-3.5) M8(-0.5,-3.5) M9(0.5,-3.5) M10(1.5,-3.5) M11(2.5,-3.5) M12(3.5,-3.5) M13(4.5,-3.5) M14(5.5,-3.5) M15(6.5,-3.5) M16(7.5,-3.5) N1(-7.5,-4.5) N2(-6.5,-4.5) N3(-5.5,-4.5) N4(-4.5,-4.5) N5(-3.5,-4.5) N6(-2.5,-4.5) N7(-1.5,-4.5) N8(-0.5,-4.5) N9(0.5,-4.5) N10(1.5,-4.5) N11(2.5,-4.5) N12(3.5,-4.5) N13(4.5,-4.5) N14(5.5,-4.5) N15(6.5,-4.5) N16(7.5,-4.5) P1(-7.5,-5.5) P2(-6.5,-5.5) P3(-5.5,-5.5) P4(-4.5,-5.5) P5(-3.5,-5.5) P6(-2.5,-5.5) P7(-1.5,-5.5) P8(-0.5,-5.5) P9(0.5,-5.5) P10(1.5,-5.5) P11(2.5,-5.5) P12(3.5,-5.5) P13(4.5,-5.5) P14(5.5,-5.5) P15(6.5,-5.5) P16(7.5,-5.5) R1(-7.5,-6.5) R2(-6.5,-6.5) R3(-5.5,-6.5) R4(-4.5,-6.5) R5(-3.5,-6.5) R6(-2.5,-6.5) R7(-1.5,-6.5) R8(-0.5,-6.5) R9(0.5,-6.5) R10(1.5,-6.5) R11(2.5,-6.5) R12(3.5,-6.5) R13(4.5,-6.5) R14(5.5,-6.5) R15(6.5,-6.5) R16(7.5,-6.5) T1(-7.5,-7.5) T2(-6.5,-7.5) T3(-5.5,-7.5) T4(-4.5,-7.5) T5(-3.5,-7.5) T6(-2.5,-7.5) T7(-1.5,-7.5) T8(-0.5,-7.5) T9(0.5,-7.5) T10(1.5,-7.5) T11(2.5,-7.5) T12(3.5,-7.5) T13(4.5,-7.5) T14(5.5,-7.5) T15(6.5,-7.5) T16(7.5,-7.5)
  silkscreen extent -9.27,-8.5 8.5,8.5, body extent -8.5,-8.5 8.5,8.5, height 1.55
TL3301 [mm]
  rect 1.4x2.1 smd: 1(-2.3,4.5) 1(-2.3,-4.5) 2(2.3,4.5) 2(2.3,-4.5)
  silkscreen extent -2.2,-2.4 2.2,2.4
VLS252012T-2R2M1R3 [mm] "Precision Wire Wound Inductor, 2-Leads, Body 2.5x2.0mm, IPC Medium Density"
  rect 1.65x2.1 smd: 1(-1.025,0) 2(1.025,0)
  body extent -1.3,-1.05 1.3,1.05, height 1.2
WM8778 [mm] "SOP, 28 Pin Wolfson Audio WM8778 Audio Codec"
  oval 2.1x0.45 smd: 1(-3.45,4.225) 2(-3.45,3.575) 3(-3.45,2.925) 4(-3.45,2.275) 5(-3.45,1.625) 6(-3.45,0.975) 7(-3.45,0.325) 8(-3.45,-0.325) 9(-3.45,-0.975) 10(-3.45,-1.625) 11(-3.45,-2.275) 12(-3.45,-2.925) 13(-3.45,-3.575) 14(-3.45,-4.225) 15(3.45,-4.225) 16(3.45,-3.575) 17(3.45,-2.925) 18(3.45,-2.275) 19(3.45,-1.625) 20(3.45,-0.975) 21(3.45,-0.325) 22(3.45,0.325) 23(3.45,0.975) 24(3.45,1.625) 25(3.45,2.275) 26(3.45,2.925) 27(3.45,3.575) 28(3.45,4.225)
  silkscreen extent -3.57,-5.25 2,5.25, body extent -2.8,-5.25 2.8,5.25, height 2

## Part data
1: library part PWR2.5, "Power jack"
C1 C2 C3 C4 C5 C6 C7 C8 C9 C10 C11 C12 C13 C14 C15 C16 C17 C18 C19 C20 C21 C22 C23 C24 C25 C26 C27 C28 C29 C30 C31 C32 C33 C34 C35 C36 C37 C38 C39 C40 C41 C42 C43 C44 C45 C46 C47 C48 C49 C50 C50 C53 C54 C55 C56 C57 C58 C59 C60 C61 C62 C63 C64 C65 C66 C67 C68 C69 C70 C71 C72 C73 C74 C75 C76 C77: "Capacitor (Semiconductor SIM Model)"
C51 C52: "Polarized Capacitor (Radial)"
D2: library part Diode, "Default Diode"
DBGEN TRST: "Header, 2-Pin"
FB14 FB15 FB16: library part Inductor, "Inductor"
J3: library part "Micro USB", "Micro USB Jack B"
microSD: library part "JAE SJ107021 microSD Card Socket"
R1 R2 R3 R4 R5 R6 R7 R8 R12 R13 R14 R15 R16 R17 R18 R19 R20 R21 R22 R27 R29 R32 R33 R34 R35 R36 R37 R38 R39 R40 R41 R42 R43 R44 R45 R47: "Resistor"
U5: "32-bit ARM Cortex-M4 MCU, 264 kB SRAM, 2 HS USB with on-chip PHY, Ethernet, CAN, AES, SPIFI, SGPIO, SCT, 256-Pin LBGA"
X2: "ABS07-32.768KHZ-T RTC Crystal Oscillator"

## Free pads (board coordinates)
  round 125.1 hole 125.1: 0(1940,2000) 0(3940,300)

## Via types
v1: diameter 30, hole 20, Top Layer to Bottom Layer, 78 vias
v2: diameter 25, hole 15, Top Layer to Bottom Layer, 56 vias
v3: diameter 50, hole 28, Top Layer to Bottom Layer, 10 vias
v4: diameter 19.68, hole 7.87, Top Layer to Bottom Layer, 6 vias

## Nets (pads, with @x,y where several pads share a name; then routed paths per layer and width w, separated by ;. In a path a pad name is that pad's centre, name@x,y a point inside that pad or via, vN(x,y) a via of type N, cw(c..) or ccw(c..) an arc to the next point about the centre after c; other vN are vias at no path point)
5VCC: "Power & Reset1.5" C57.2 C58.1 C62.2 L2.2 R20.2 U8.6 U10.7 | length 4275.7
  Top Layer w10: U8.6@338.32,692.4 338.32,704.84 v1(368.48,735) ; U10.7@1482.52,2555 1507.81,2555 C62.2@1562.81,2610
  Top Layer w25: C58.1@103.48,788.07 103.48,828.48 175,900 v3(205,900) 230,875 275.47,875
  Bottom Layer w25: v1(148.48,735) 178.48,765 338.48,765 v1(368.48,735) ; v3(205,900) 115,900 79.5,864.5 79.5,295.5 179,196 646,196 700,250 1775,250 1805,280 2403.84,280 2488.84,195 2745,195 2840,100
ADC_RX_MCLK: U4.9 U5.M11 | length 183.3
  Top Layer w8: 2783.05,813.05 v2(2800,830) ; v2(2810,950) 2845,950 2851.61,956.61 U4.9@2904.17,956.61
  Bottom Layer w8: 2790,860 2800,850 v2(2800,830) ; 2790,930 v2(2810,950)
ADC_RX_SCK: U4.8 U5.F13 | length 145.3
  Top Layer w8: 2765,995 2805,995 2818.81,981.18 U4.8@2903.15,981.18
  Top Layer w10: U4.8@2903.15,981.18 U4.8@2904.17,982.2
ADC_RX_SDA: U4.10 U5.F11 | length 183.5
  Top Layer w8: 2750.65,855.05 2823.52,927.91 U4.10@2904.02,927.91
ADC_RX_WS: U4.11 U5.G11 | length 172.9
  Top Layer w8: 2756.45,841.05 2817.73,902.32 U4.11@2904.02,902.32
AVDD: C1.2 C2.2 C3.2 C4.2 C5.2 C6.2 C10.2 C11.2 C54.2 C55.1 FB5.1 L1.2 R3.2 R19.2 U1.3 U1.6 U2.3 U2.6 U3.3 U3.6 U4.26 U7.6 | length 1840.8
  Top Layer w10: U7.6@1123.32,692.4 1123.32,704.84 v1(1153.48,735) ; U4.26@3175.83,1110.16 3217.6,1110.16 3265,1157.56 C10.2@3295,1157.56 ; v1(3275,330) 3305,360 3310,360 3319.41,369.41 U1.3@3348.58,369.41 ; C10.2@3285,1160 C11.2@3335,1160 3335.16,1160.16 v1(3380.16,1160.16) ; v1(3385,910) R3.2@3385,948.03 ; U1.6@3421.42,420.59 3429.69,428.86 C1.2@3429.69,470 v1(3465,470) ; v1(3475,330) 3500,355 C4.2@3500,360.31 3525.31,360.31 3534.41,369.41 U2.3@3548.58,369.41 ; U2.6@3621.42,420.59 3621.42,431.42 3629.69,439.69 C3.2@3629.69,470 v1(3660,470) ; v1(3675,330) 3700,355 C6.2@3700,360.31 3725.31,360.31 3734.41,369.41 U3.3@3748.58,369.41 ; U3.6@3821.42,420.59 3821.42,441.42 3829.69,449.69 C5.2@3829.69,470 v1(3865,470)
  Top Layer w25: C55.1@888.48,788.07 888.48,825 958.48,895 v3(988.48,895) 1008.48,875
  Bottom Layer w10: 2725,1257.05 2828.95,1361 3094,1361 3150,1305 v1@3150,1257.05
  Bottom Layer w25: v1(933.48,735) 963.48,765 1123.48,765 v1(1153.48,735)
  other v1: 3150.16,1260.16
DAC_TX_MLCK: U4.5 U5.B14 | length 113.4
  Top Layer w8: 2790.66,1055.87 U4.5@2904.02,1055.87
DAC_TX_SCK: U4.4 U5.H4 | length 203
  Top Layer w8: 2730,1015 2799.57,1084.57 U4.4@2904.17,1084.57
DAC_TX_SDA: U4.6 U5.C12 | length 135.7
  Top Layer w8: v2(2808.23,1030.28) U4.6@2904.02,1030.28
  Bottom Layer w8: 2780,1002.05 v2(2808.23,1030.28)
DAC_TX_WS: U4.7 U5.L3 | length 300
  Top Layer w8: 2762.25,827.05 2802.25,867.05 v2(2815,867.05) ; v2(2832.64,1004.68) U4.7@2904.02,1004.68
  Bottom Layer w8: v2(2815,867.05) 2850,902.05 2850,987.32 v2(2832.64,1004.68)
DVDD: "Power & Reset1.2" "Power & Reset1.4" C8.2 C9.2 C26.2 C27.2 C28.2 C32.1 C37.2 C38.2 C39.2 C40.2 C41.2 C42.2 C43.2 C44.2 C45.2 C46.2 C47.2 C48.2 C49.2 C50.2 C60.2 C61.1 C65.2 C66.2 C67.2 C69.2 C70.2 C71.2 C75.2 C76.2 C77.2 DBGEN.1 FB1.1 FB2.1 JTAG/DEBUG.1@1720,1960 L3.2 microSD.4 R1.2 R2.2 R6.1 R7.1 R12.2 R17.2 R18.2 R21.2 R22.1 R40.1 R41.1 R42.1 R43.1 R44.1 R45.1 TRST.1 U4.13 U5.B10 U5.D7 U5.E12 U5.F7 U5.F8 U5.F9 U5.F10 U5.G10 U5.H10 U5.J6 U5.J7 U5.K7 U5.L7 U5.L8 U5.L9 U5.L10 U5.N7 U5.N13 U6.3 U6.6 U9.6 | length 6570.1
  Top Layer w10: v1(190,1059.92) 215,1084.92 R40.1@240.47,1084.92 ; v1(200,1429.92) 230,1459.92 R45.1@240.47,1459.92 ; v1(200,1509.92) R44.1@240.47,1509.92 ; v1(235,995) R41.1@235,1029.45 ; R41.1@240,1034.45 R41.1@240.47,1034.92 ; v1(240,1174.92) 240.47,1174.45 R42.1@240.47,1134.92 ; v1(240,1369.92) 240.47,1370.39 R43.1@240.47,1409.92 ; C71.2@266.93,1274.92 380,1274.92 401.65,1253.27 microSD.4@500.28,1253.27 ; v1(300,1230) C71.2@300,1280 ; U9.6@733.32,692.4 733.32,704.84 v1(763.48,735) ; TRST.1@985,1960 945,1920 945,1885 v1(1035,1885) ; v1(1195,1915) C28.2@1232.44,1877.56 ; v1(1215,2410) R22.1@1215,2450.47 ; R17.2@1560.47,1825 1560.47,1804.53 1570,1795 v1@1755,1795 ; C26.2@1690,2622.44 v1(1690,2665) ; C26.2@1692.44,2620 1694.41,2618.03 U6.6@1694.41,2566.42 ; JTAG/DEBUG.1@1720,1960 1720.31,1959.69 1820,1959.69 v1(1820,2005) ; R18.2@1729.53,1825 1729.53,1820.47 v1@1755,1795 ; U6.3@1745.59,2493.58 1745.59,2443.03 C50.2@1742.56,2440 v1(1785,2440) ; v1(1760,1800) v1@1755,1795 ; 2754.53,440 v2(2795,440) 2860,440 2880,460 2880,570 v1(2840,610) ; U4.13@2904.17,854.25 2951.06,854.25 2969.16,836.16 2969.16,774.47 C8.2@2940,745.31 C9.2@2940,695.31 2940,695 v1(2905.16,660.16) ; v1@3040.63,700.63 R1.2@3040.63,745.16 ; v1@3199.69,700.63 R2.2@3199.69,745.16
  Top Layer w15: v1(2950,1300) R6.1@2989.53,1300 ; R7.1@3045,1299.53 v1(3045,1335)
  Top Layer w25: C61.1@498.48,788.07 498.48,820 573.48,895 v3(600,895) 620,875
  Bottom Layer w10: v1(2900,795) 2900,770 2969.84,700.16 v1(3040.16,700.16)
  Bottom Layer w25: v3(65,1030) 95,1000 95,923.84 48.5,877.34 48.5,282.66 166.16,165 658.84,165 712.84,219 1787.84,219 1817.84,249 2391,249 2480,160 ; v1(543.48,735) 573.48,765 733.48,765 v1(763.48,735) ; 2540,100 2480,160 ; 2740,100 2680,160 2480,160
  other v1: 3200.16,700.16